# Altium PCB LiDAR_PMT_Gain_PCB.PcbDoc
Units mm, origin at the board's own origin, x right, y up, seen from the top; angles counter-clockwise.
Board outline 42.04 x 62.1 mm, 2 copper layers (TOP, GND); 15 components, 11 nets, 106 pads, 2 vias.
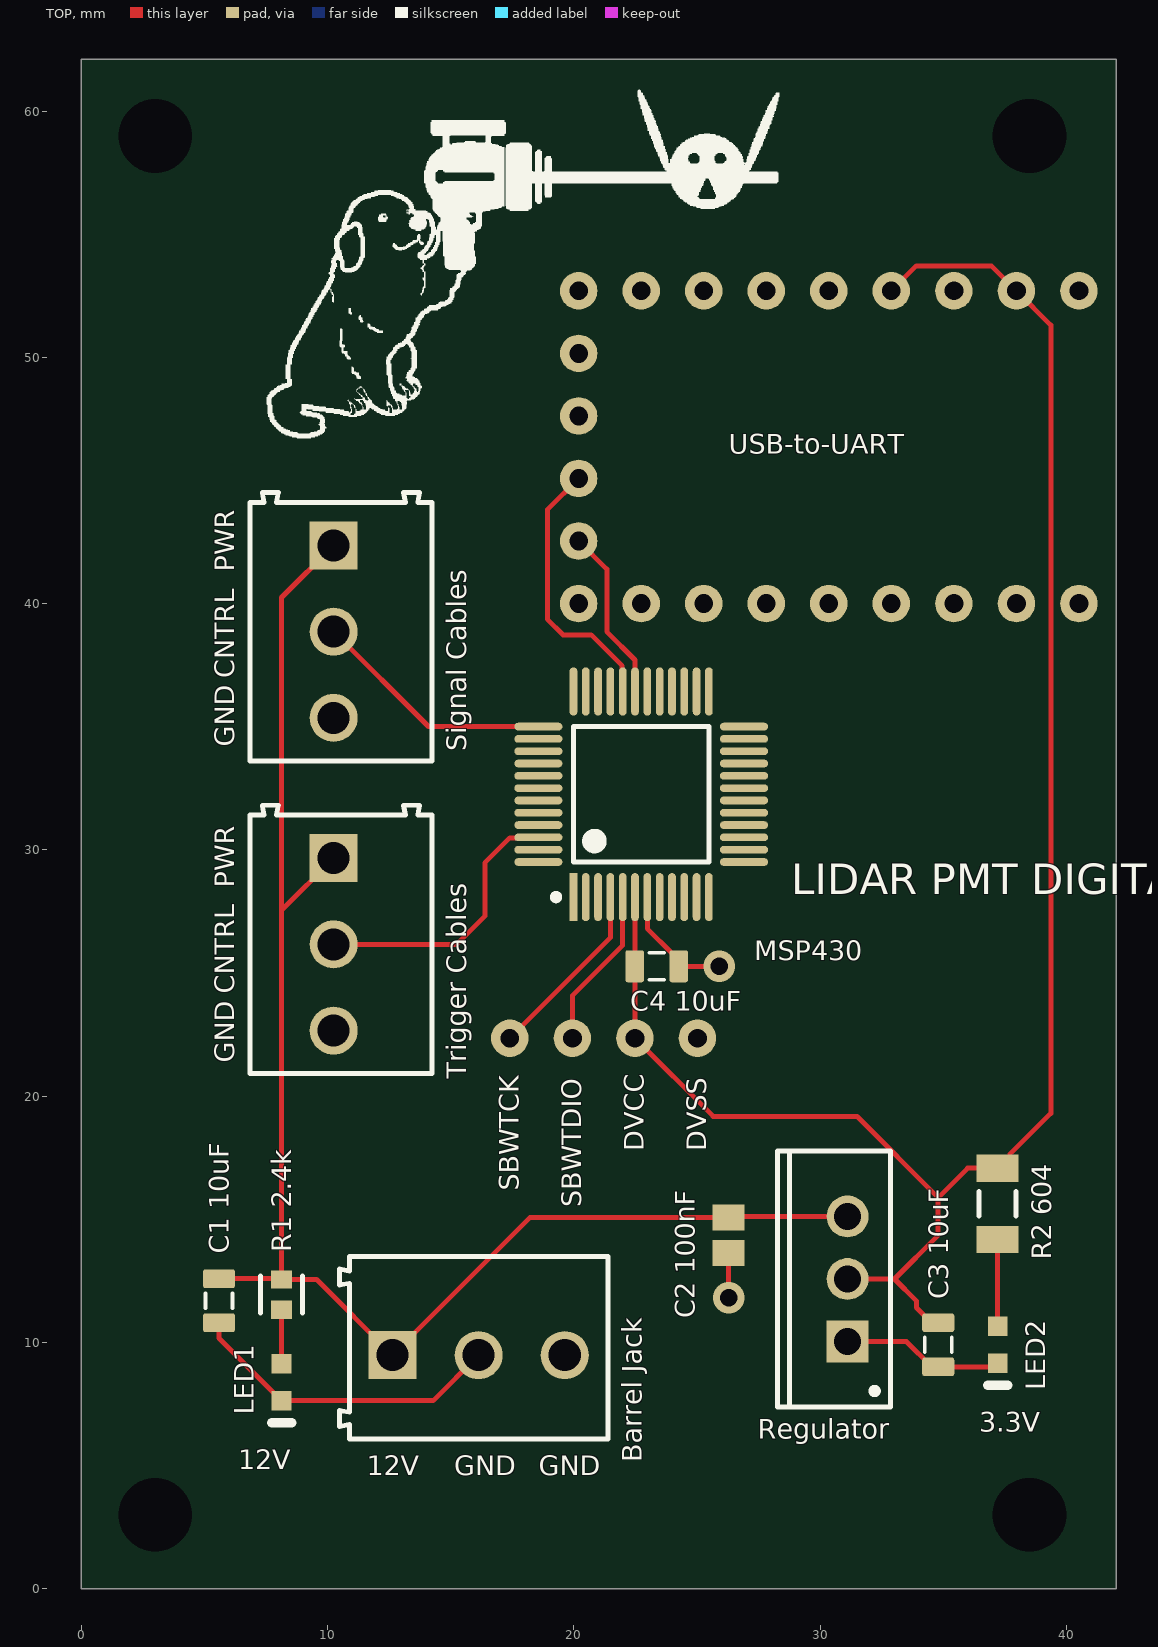
[diagram p0: TOP view]
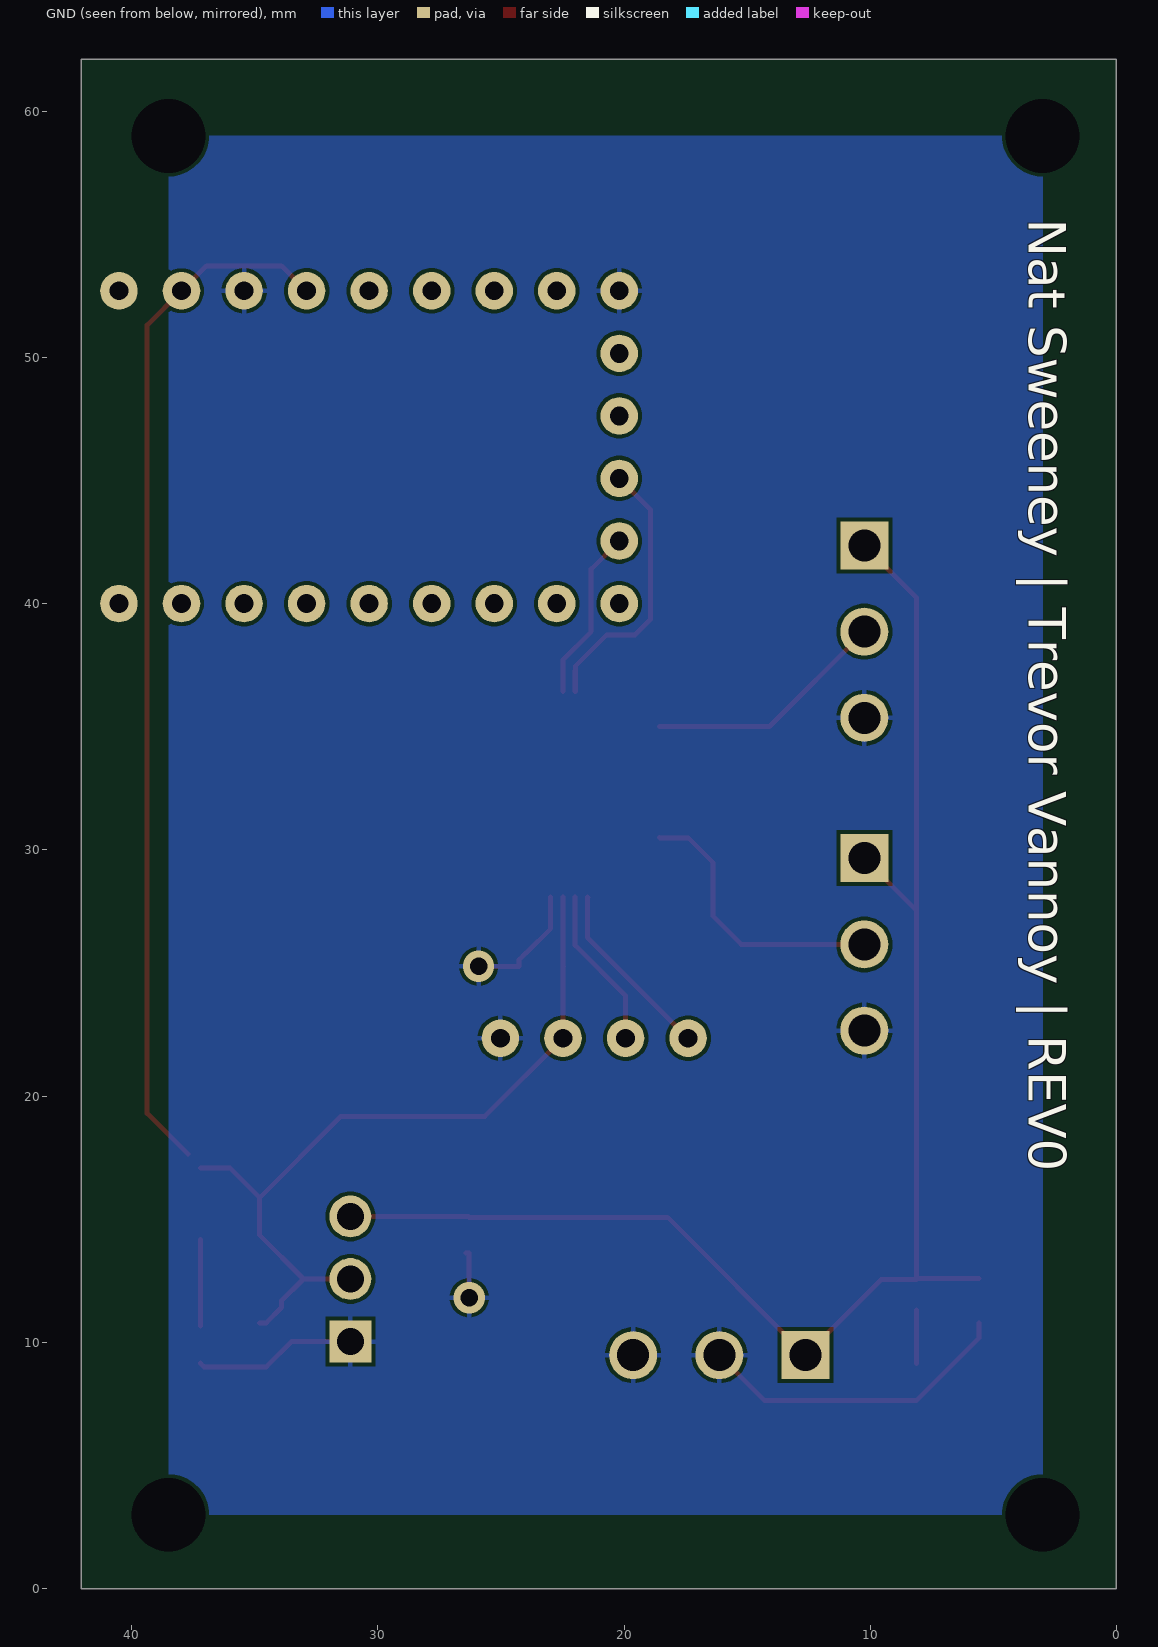
[diagram p1: GND view, seen from below]
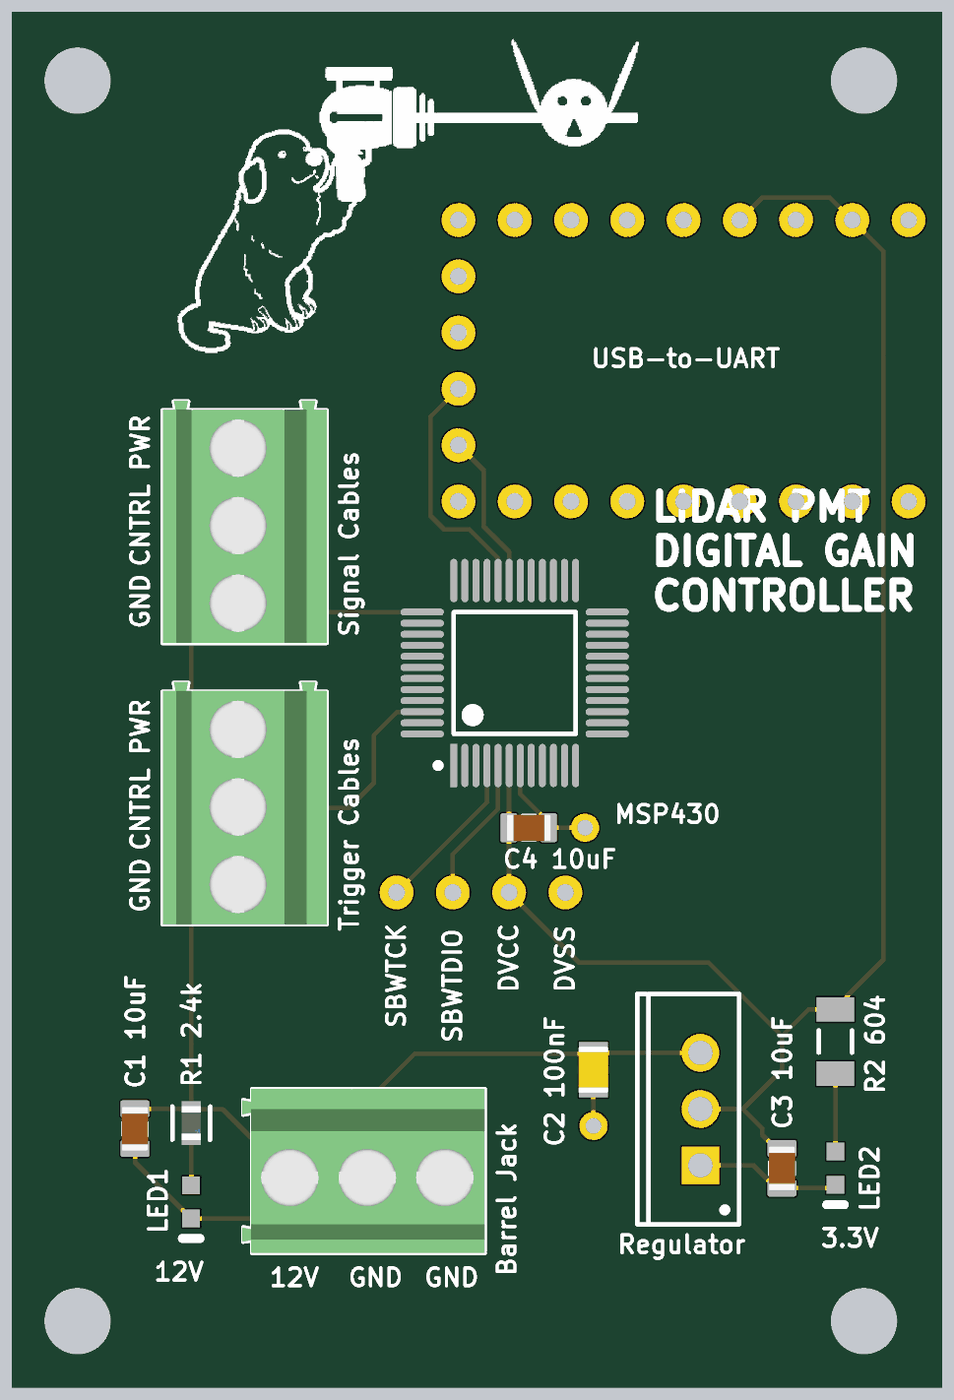
[diagram p2: 3D render of the assembled board from above, using the file's embedded part models]

## Layer stack, top to bottom
Top Solder: solder mask 0.0102, Solder Resist, Dk 3.5
TOP: signal copper 0.0356
Dielectric 1: dielectric 0.32, FR-4, Dk 4.8
GND: signal copper 0.0356
Bottom Solder: solder mask 0.0102, Solder Resist, Dk 3.5

## Board outline
0,0 42.037,0 42.037,62.103 0,62.103

## Design rules (kind name [scope] priority, off if disabled: settings)
BoardOutlineClearance [All] p1: gap=0.381 ignorepadtopadclearanceinfootprint=FALSE
Clearance [All] p1: gap=0.152 ignorepadtopadclearanceinfootprint=FALSE except(0: Arc-Hole Track-Hole SMDPad-Hole THPad-Hole Via-Hole Fill-Hole Poly-Hole Region-Hole Text-Hole)
ComponentClearance [All] p1: gap=0.025 collisioncheckmode=3 verticalgap=0.025 showdistances=FALSE
DiffPairsRouting [All] p1: maxlimit=10 minlimit=0.152 mostfreqgap=0.203 toplayer_minwidth=0.152 toplayer_maxwidth=0.381 toplayer_prefwidth=0.203 bottomlayer_minwidth=0.152 bottomlayer_maxwidth=0.381 bottomlayer_prefwidth=0.203 maxuncoupledlength=12.7
HoleSize [All] p1: absolutevalues=TRUE maxlimit=6.731 minlimit=0.33 maxpercent=80.000 minpercent=20.000
HoleToHoleClearance [All] p1: gap=0.254 allowstackedmicrovias=FALSE
MinimumAnnularRing [All] p1: minimumring=0.178
MinimumSolderMaskSliver [All] p1: minsoldermaskwidth=0
PlaneClearance [All] p1: clearance=0.254
PlaneConnect [All] p1: planeconnectstyle=Direct reliefexpansion=0.406 reliefentries=4 reliefconductorwidth=0.152 reliefairgap=0.152
PolygonConnect [All] p1: connectstyle=Relief reliefconductorwidth=0.203 reliefentries=4 polygonreliefangle="90 Angle" airgapwidth=0.152
RoutingCorners [All] p1: cornerstyle=45-Degree minsetback=1.25 maxsetback=1.25
RoutingVias [All] p1: holewidth=0.381 width=0.762 viastyle="Through Hole" minholewidth=0.33 minwidth=0.686 maxholewidth=2.54 maxwidth=2.896
SilkToSilkClearance [All] p1: silktosilkclearance=0
SilkToSolderMaskClearance [IsPad] p1: minsilkscreentomaskgap=0.152 clearancetoexposedcopper=TRUE
SolderMaskExpansion [All] p1: expansion=0.075 istentingtop=FALSE
Width [All] p1: maxlimit=10.16 minlimit=0.152 preferedwidth=0.203
20 further rules are at their usual default settings.

## Classes and differential pairs
component class PMT_Gain: "LED1 (12V)"

## Components (designator, comment, footprint, x,y, rotation, side; value= is the part's Value field where it differs from the comment)
* "1 x 4 Header, Pitch 2.54mm" "1 x 4 Header, Pitch 2.54mm-Footprint-1" 17.399,22.352 r0 top
"Barrel Jack" "691214110003" 691214110003 16.129,9.779 r0 top (schematic designator "Barrel Jack Terminal")
"C1 10uF" "Capacitor 10µF +/-20% 25V 0805" CAPC0805(2012)145_L 5.588,11.684 r270 top value=10µF (schematic designator C1)
"C2 100nF" "Capacitor 100 nF +/-10% 50 V 0805" CAPC2013X95X50LL10T25 26.289,14.351 r270 top value=100nF (schematic designator C2)
"C3 10uF" "Capacitor 10µF +/-20% 25V 0805" CAPC0805(2012)145_L 34.798,9.895 r270 top value=10µF (schematic designator C3)
"C4 10uF" "Capacitor 10µF +/-20% 25V 0805" CAPC0805(2012)145_L 23.368,25.273 r0 top value=10µF (schematic designator C4)
LED1 "LTST-C190GKT" LTST-C190GKT_V 8.128,8.382 r270 top
LED2 "LTST-C190GKT" LTST-C190GKT_V 37.211,9.906 r270 top
MSP430 "MSP430FR2355TPTR" FP-PT0048A-IPC_A 22.733,32.258 r90 top
"R1 2.4k" "CRCW06032K40FKEA" FP-CRCW0603-e3-IPC_C 8.128,11.938 r270 top value=2.4k (schematic designator R1)
"R2 604" "CRCW1206604RFKEA" RESC3216X60X45NL10T20 37.211,15.621 r270 top value=604 (schematic designator R2)
Regulator "LD1117AV33" TO220 31.115,12.573 r90 top (schematic designator "Linear Regulator")
"Signal Cables" "691214110003" 691214110003 10.541,38.862 r270 top
"Trigger Cables" "691214110003" 691214110003 10.541,26.162 r270 top
USB-to-UART "Adafruit 5335 CP2102 Friend Header Connection" "2.54mm, 1x8 Male Pin Header Generic-Footprint-1" 40.513,52.705 r180 top

## Footprints (in the part's own frame and the unit in brackets; to place one, negate y for a bottom-side part, rotate by r counter-clockwise, add the part's x,y. Pads: shape width x height; smd on the part's side, far side on the other; paste and mask are expansions set on the pad)
"1 x 4 Header, Pitch 2.54mm-Footprint-1" [mil]
  round 60 hole 30: 1(0,0) 2(100,0) 3(200,0) 4(300,0)
"2.54mm, 1x8 Male Pin Header Generic-Footprint-1" [mil]
  round 60 hole 30: 1(0,0) 2(100,0) 3(200,0) 4(300,0) 5(400,0) 6(500,0) 7(600,0) 8(700,0) 9(800,0) 10(800,100) 11(800,200) 12(800,300) 13(800,400) 14(800,500) 15(700,500) 16(600,500) 17(500,500) 18(400,500) 19(300,500) 20(200,500) 21(100,500) 22(0,500)
691214110003 [mm] "3.50 mm Horizontal Entry Modular, 3p"
  rect 1.95x1.95 hole 1.3: 1(-3.5,-0.3)
  round 1.95 hole 1.3: 2(0,-0.3) 3(3.5,-0.3)
  silkscreen extent -5.65,-3.7 5.25,3.7, body extent -5.7,-3.7 5.25,3.7, height 8.55
CAPC0805(2012)145_L [mm] "Chip Capacitor, Body 2.0x1.2mm, Height 1.45mm, IPC High Density"
  rrect25% 0.76x1.3 smd: 1(-0.9,0) 2(0.89,0)
  silkscreen extent -0.3,-0.55 0.3,0.55, body extent -1,-0.6 1,0.6, height 1.45
CAPC2013X95X50LL10T25 [mm] "Chip Capacitor, 2-Leads, Body 2.10x1.35mm, IPC High Density"
  rect 1.05x1.3 smd: 1(-0.725,0) 2(0.725,0)
  body extent -1.05,-0.67 1.05,0.67, height 0.95
FP-CRCW0603-e3-IPC_C [mm]
  rect 0.735x0.862 smd paste+0 mask+0: 1(-0.615,0) 2(0.615,0)
  silkscreen extent -0.75,-0.85 0.75,0.85, body extent -1.08,-0.58 1.08,0.58, height 0.25
FP-PT0048A-IPC_A [mm]
  rect 1.955x0.312 smd paste+0 mask+0: 1(-4.175,2.75)
  rrect100% 1.955x0.312 smd paste+0 mask+0: 2(-4.175,2.25) 3(-4.175,1.75) 4(-4.175,1.25) 5(-4.175,0.75) 6(-4.175,0.25) 7(-4.175,-0.25) 8(-4.175,-0.75) 9(-4.175,-1.25) 10(-4.175,-1.75) 11(-4.175,-2.25) 12(-4.175,-2.75) 25(4.175,-2.75) 26(4.175,-2.25) 27(4.175,-1.75) 28(4.175,-1.25) 29(4.175,-0.75) 30(4.175,-0.25) 31(4.175,0.25) 32(4.175,0.75) 33(4.175,1.25) 34(4.175,1.75) 35(4.175,2.25) 36(4.175,2.75)
  rrect100% 0.312x1.955 smd paste+0 mask+0: 13(-2.75,-4.175) 14(-2.25,-4.175) 15(-1.75,-4.175) 16(-1.25,-4.175) 17(-0.75,-4.175) 18(-0.25,-4.175) 19(0.25,-4.175) 20(0.75,-4.175) 21(1.25,-4.175) 22(1.75,-4.175) 23(2.25,-4.175) 24(2.75,-4.175) 37(2.75,4.175) 38(2.25,4.175) 39(1.75,4.175) 40(1.25,4.175) 41(0.75,4.175) 42(0.25,4.175) 43(-0.25,4.175) 44(-0.75,4.175) 45(-1.25,4.175) 46(-1.75,4.175) 47(-2.25,4.175) 48(-2.75,4.175)
  silkscreen extent -4.3,-2.75 2.75,3.58
LTST-C190GKT_V [mm] "SMD, 2-Leads, Body 1.6x0.8mm"
  rect 0.8x0.8 smd: 1(-0.75,0) 2(0.75,0)
  silkscreen extent 1.65,-0.4 1.65,0.4, body extent -0.8,-0.4 0.8,0.4, height 0.9
RESC3216X60X45NL10T20 [mm] "Chip Resistor, 2-Leads, Body 3.20x1.60mm, IPC Medium Density"
  rect 1.1x1.7 smd: 1(-1.45,0) 2(1.45,0)
  silkscreen extent -0.5,-0.75 0.5,0.75, body extent -1.65,-0.85 1.65,0.85, height 0.6
TO220 [mm] "TO, Thru-Hole, Vertical, Heatsink Mounted; 3 In-Line Leads; Pitch 2.54 mm"
  rect 1.7x1.7 hole 1.1: 1(-2.54,0)
  round 1.7 hole 1.1: 2(0,0) 3(2.54,0)
  silkscreen extent -5.2,-1.75 5.2,2.85, body extent -5.25,-1.8 5.25,2.9, height 19.7

## Part data
*: library part CMP-002-00074-2
"Barrel Jack" "Signal Cables" "Trigger Cables": library part CMP-002-00071-1, "2141 Series 3.5mm Pitch Straight; PCB Terminal Block; Through Hole; 3 Way", RoHS Compliant=Yes
"C1 10uF" "C3 10uF" "C4 10uF": library part CMP-001-00079-4, "Chip Capacitor, 10µF +/-20%, 25V, 0805, Thickness 1.45 mm", Case/Package=0805, Max Operating Temperature=85°C, Min Operating Temperature=-55°C, Tolerance=10%, Voltage Rating=25V, Mounting Technology=SMT, Pins=2
"C2 100nF": library part CMP-001-00018-6, "Chip Capacitor, 100 nF, +/- 10%, 50 V, 0805 (2012 Metric)", Capacitor Type=Ceramic, Case/Package=0805, Max Operating Temperature=125°C, Min Operating Temperature=-55°C, Tolerance=10%, Voltage Rating=50V, Mounting Technology=SM, Pins=2, RoHS Compliant=True
LED1 LED2: library part CMP-007-00022-2, "LED Uni-Color Green, 100 mW, 30 mA, -55 to 85 degC, 2-Pin SMD, RoHS, Tape and Reel", Case/Package=0603, Colour=Green, Forward Current=20mA, Forward Voltage=2.1V, Manufacturer=Lite-On, Max Operating Temperature=85°C, Min Operating Temperature=-55°C, Package Description="2-Pin Surface Mount Device, Body 1.6 x 0.8 mm", Package Quantity=3000, Package Reference=C190GKT, Power=100mW, Datasheet URL=http://datasheet.octopart.com/LTST-C190GKT-Lite-On-datasheet-158530.pdf, Datasheet Version=Dec-06, Illumination Colour=Green, Lens Style=Clear, Luminous Intensity=6mcd, Manufacturer URL=http://www.us.liteon.com/, Mounting Technology=SM, Nominal Vf=2.1V, Packaging=TapeandReel, Pins=2, RoHS Compliant=True, Viewing Angle=130degrees
MSP430: library part CMP-020-00023-1, "RISC Microcontroller, 16-Bit, FRAM, MSP430 CPU, 24MHz, CMOS, PQFP48", RoHS Compliant=Yes
"R1 2.4k": library part CMP-009-00177-1, "Fixed Resistor, Metal Glaze/thick Film, 0.1W, 2400ohm, 75V, 1% +/-Tol, 100ppm/Cel, Surface Mount, 0603", Case/Package=0603, Max Operating Temperature=155°C, Min Operating Temperature=-55°C, Power=100mW, Tolerance=1%, Mounting Technology="Surface Mount", Pins=2, RoHS Compliant=Yes
"R2 604": library part CMP-009-00178-1, "Fixed Resistor, Metal Glaze/thick Film, 0.25W, 604ohm, 200V, 1% +/-Tol, 100ppm/Cel, Surface Mount, 1206", Case/Package=1206, Max Operating Temperature=155°C, Min Operating Temperature=-55°C, Power=250mW, Tolerance=1%, Mounting Technology="Surface Mount", Pins=2, RoHS Compliant=Yes
Regulator: library part CMP-019-00052-1, "LD1117 Series 1 A 3.3 V Fixed Output Positive Voltage LDO Regulator - TO-220", Case/Package=TO-220, Max Supply Voltage=10V, Pins=3, RoHS Compliant=Yes
USB-to-UART: library part 5335-2, "Connection to Adafruit 5335 to PCB"

## Free pads (board coordinates)
  round 1.524 hole 3 unplated: MOUNT1(3,3) MOUNT1(3,59) MOUNT1(38.5,3) MOUNT1(38.5,59)

## Via types
v1: diameter 1.27, hole 0.711, TOP to GND, 2 vias

## Nets (pads, with @x,y where several pads share a name; then routed paths per layer and width w, separated by ;. In a path a pad name is that pad's centre, name@x,y a point inside that pad or via, vN(x,y) a via of type N, cw(c..) or ccw(c..) an arc to the next point about the centre after c; other vN are vias at no path point)
GND: "Barrel Jack.2" "Barrel Jack.3" "C1 10uF.2" "C2 100nF.2" "C3 10uF.2" "C4 10uF.2" "Signal Cables.3" "Trigger Cables.3" *.4 LED1.2 LED2.2 MSP430.7 Regulator.1 USB-to-UART.3 USB-to-UART.9 | length 26.5
  TOP w0.203: 5.588,10.794 5.588,10.172 LED1.2 14.282,7.632 16.129,9.479 ; MSP430.7 22.983,26.8 23.962,25.821 23.98,25.821 24.258,25.543 24.258,25.273 v1(25.908,25.273) ; v1(26.289,11.811) 26.289,13.626 26.414,13.626 ; Regulator.1 33.5,10.033 34.528,9.005 34.798,9.005 37.06,9.005 LED2.2
Net*_1: *.1 MSP430.4 | length 7.5
  TOP w0.203: *.1 21.483,26.436 MSP430.4 MSP430.4@21.462,28.062
Net*_2: *.2 MSP430.5 | length 6.6
  TOP w0.203: *.2 19.939,24.078 21.983,26.122 MSP430.5
Net*_3: "C3 10uF.1" "C4 10uF.1" "R2 604.1" *.3 MSP430.6 Regulator.2 USB-to-UART.2 USB-to-UART.4 | length 74.5
  TOP w0.203: MSP430.6 22.475,28.075 22.475,25.281 22.468,25.273 22.473,25.268 22.473,22.358 *.3 25.654,19.177 31.496,19.177 34.798,15.875 ; Regulator.2 33.02,12.573 ; USB-to-UART.4 33.909,53.721 36.957,53.721 USB-to-UART.2 39.37,51.308 39.37,19.304 37.719,17.653 ; 34.798,10.795 34.528,10.795 33.909,11.414 33.909,11.684 33.02,12.573 ; 37.211,17.071 35.994,17.071 34.798,15.875 ; 33.02,12.573 34.798,14.351 34.798,15.875
"NetBarrel Jack Terminal_1": "Barrel Jack.1" "C1 10uF.1" "C2 100nF.1" "R1 2.4k.1" "Signal Cables.1" "Trigger Cables.1" Regulator.3 | length 62.8
  TOP w0.203: 5.588,12.584 8.097,12.584 8.128,12.553 ; 10.241,29.662 8.128,27.549 ; 10.241,42.362 8.128,40.249 8.128,27.549 ; Regulator.3 26.326,15.113 26.289,15.076 18.226,15.076 12.629,9.479 9.555,12.553 8.128,12.553 ; 8.128,12.553 8.128,27.549
NetLED1_1: "R1 2.4k.2" LED1.1 | length 2.2
  TOP w0.203: LED1.1 8.128,11.323
NetLED2_1: "R2 604.2" LED2.1 | length 3.5
  TOP w0.203: LED2.1 37.211,14.171
NetMSP430_31: MSP430.31 USB-to-UART.13 | length 7.1
  TOP w0.203: USB-to-UART.13 21.336,41.402 21.336,38.862 22.483,37.715 MSP430.31
NetMSP430_32: MSP430.32 USB-to-UART.12 | length 12
  TOP w0.203: USB-to-UART.12 18.923,43.815 18.923,39.37 19.558,38.735 20.701,38.735 21.962,37.474 21.962,36.454 MSP430.32 MSP430.32@21.983,37.284
NetMSP430_37: "Signal Cables.2" MSP430.37 | length 9.9
  TOP w0.203: 10.241,38.862 14.095,35.008 MSP430.37
NetMSP430_46: "Trigger Cables.2" MSP430.46 | length 11.4
  TOP w0.203: 10.241,26.162 15.24,26.162 16.383,27.305 16.383,29.472 17.398,30.487 18.537,30.487 MSP430.46
pads on no net: MSP430.1 MSP430.2 MSP430.3 MSP430.8 MSP430.9 MSP430.10 MSP430.11 MSP430.12 MSP430.13 MSP430.14 MSP430.15 MSP430.16 MSP430.17 MSP430.18 MSP430.19 MSP430.20 MSP430.21 MSP430.22 MSP430.23 MSP430.24 MSP430.25 MSP430.26 MSP430.27 MSP430.28 MSP430.29 MSP430.30 MSP430.33 MSP430.34 MSP430.35 MSP430.36 MSP430.38 MSP430.39 MSP430.40 MSP430.41 MSP430.42 MSP430.43 MSP430.44 MSP430.45 MSP430.47 MSP430.48 USB-to-UART.1 USB-to-UART.5 USB-to-UART.6 USB-to-UART.7 USB-to-UART.8 USB-to-UART.10 USB-to-UART.11 USB-to-UART.14 USB-to-UART.15 USB-to-UART.16 USB-to-UART.17 USB-to-UART.18 USB-to-UART.19 USB-to-UART.20 USB-to-UART.21 USB-to-UART.22

## Polygon pours and split planes (outlines as drawn)
GND on GND "GND-GND" (solid, pour order 1): 3,3 38.5,3 38.5,59 3,59

## Silkscreen, mask and mechanical layers (free items; w line width, h text height)
Top Overlay:
  drawing of 11 lines, arcs and shapes, not listed
  text "PWR" at 6.2,41.298 h0.8 r90
  text "CNTRL" at 6.2,36.98 h0.8 r90
  text "GND" at 6.2,34.186 h0.8 r90
  text "PWR" at 6.2,28.471 h0.8 r90
  text "LIDAR PMT DIGITAL GAIN CONTROLLER" at 28.829,28.194 h1.25
  text "CNTRL" at 6.2,24.153 h0.8 r90
  text "GND" at 6.2,21.359 h0.8 r90
  text "3.3V" at 36.472,6.373 h0.8
  text "12V" at 6.373,4.849 h0.8
  text "12V" at 11.58,4.595 h0.8
  text "GND" at 15.136,4.595 h0.8
  text "GND" at 18.565,4.595 h0.8
Bottom Overlay:
  text "Nat Sweeney | Trevor Vannoy | REV0" at 3.556,55.626 h1.52 r90
Top Courtyard:
  text "1" at 16.256,23.876 h0.5
  text "2" at 18.542,23.876 h0.5
  text "3" at 21.082,23.876 h0.5
  text "4" at 23.622,23.749 h0.5
  text "3.3V" at 35.941,6.858 h0.76
  text "12V" at 7.239,5.461 h0.76

## Text inside footprints (layer, text, board x,y; h text height)
*: Top Overlay "SBWTCK" at 17.757,16.152 h0.8 r90; Top Overlay "SBWTDIO" at 20.297,15.486 h0.8 r90; Top Overlay "DVCC" at 22.837,17.751 h0.8 r90; Top Overlay "DVSS" at 25.377,17.751 h0.8 r90